# EAGLE board BluetoothBoard-0BAC0702 (EAGLE 5.10)
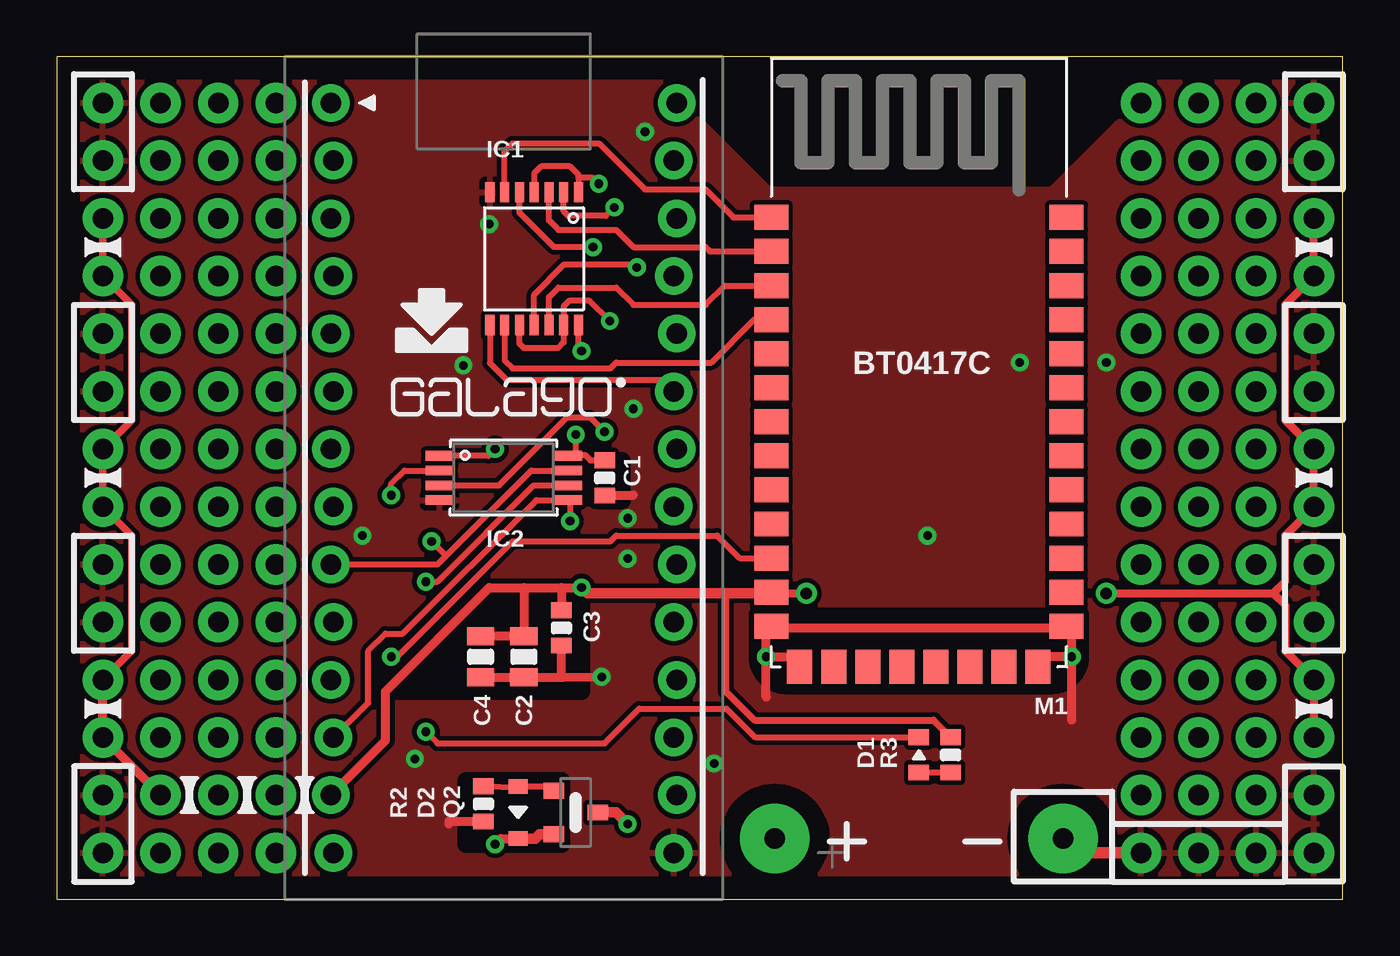
[diagram p0: board, top side]
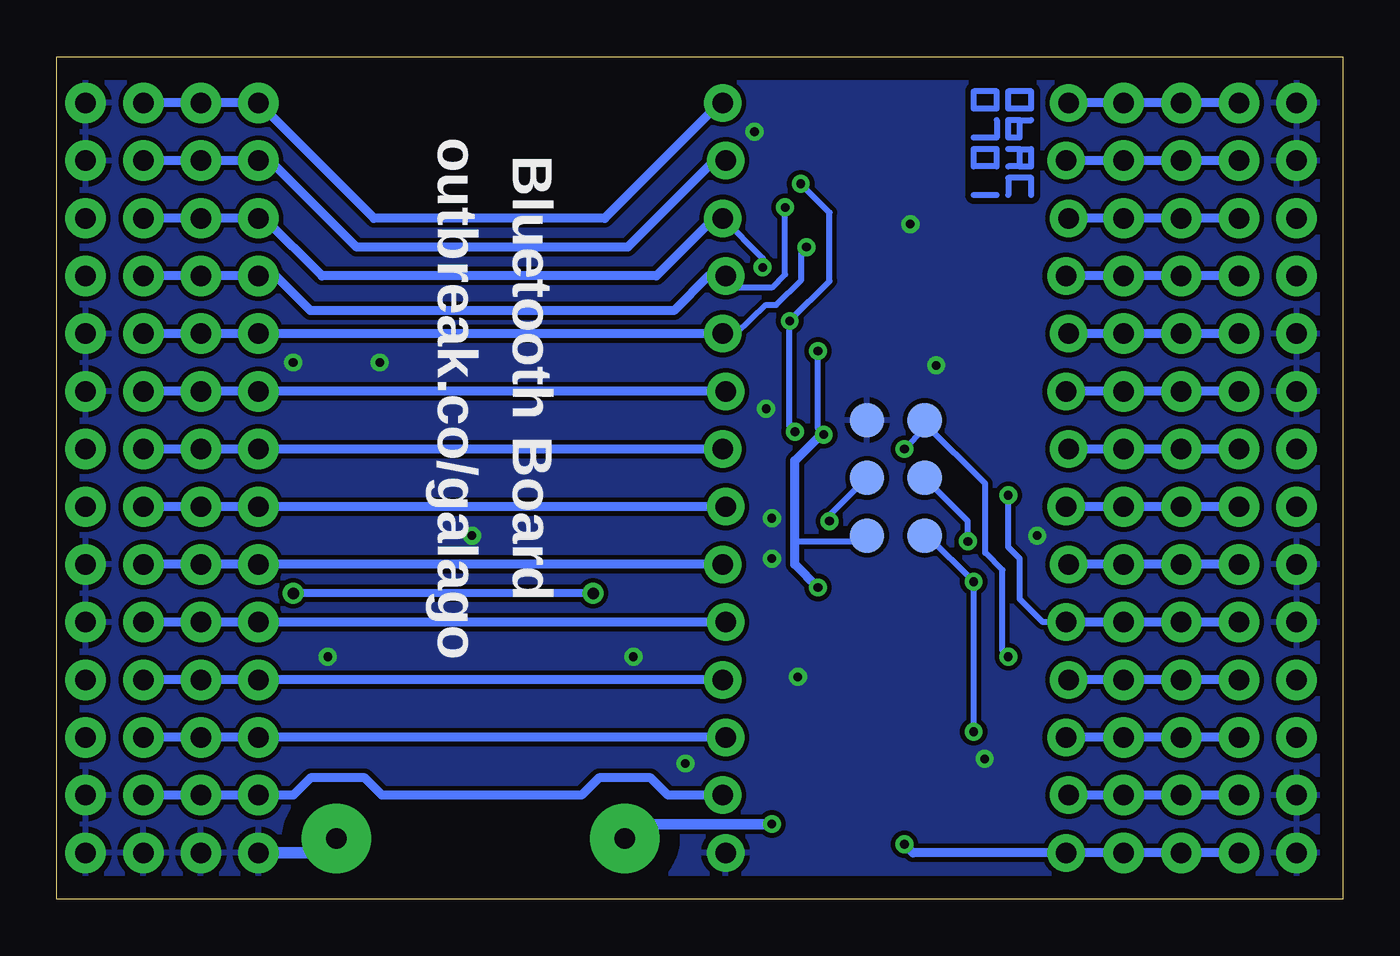
[diagram p1: board, bottom side, seen from below]

Size 56.64 x 37.08 mm. Coordinates in mm from the lower left corner, seen from the top.
Outline: 0,0 56.64,0 56.64,37.08 0,37.08 0,0
Copper layers (1*16): Top 0.035mm / dielectric 1.5mm / Bottom 0.035mm
Design rules "default *": minimum track width 8mil, minimum drill 15mil, track to track 8mil, track to pad 8mil, pad to pad 8mil, via to via 8mil, smd to smd 8mil, copper to edge 40mil, drill to drill 8mil, minimum pad ring 10mil, minimum via ring 8mil, stop-mask expansion 4mil, vias tented up to drill 20mil, thermal gap 10mil
tRestrict: area 42,0.4 to 46.6,5; area 29.3,0.4 to 33.9,5; area 14.7,9.1 to 23.1,13; area 23.9,17.5 to 24.9,19.3; area 18,2.4 to 22.2,5.2; area 30.9,9.4 to 45.1,12.4
bRestrict: area 29.3,0.4 to 33.9,5; area 42,0.4 to 46.6,5; area 13.7,31 to 16.3,35.6

## Footprints (pad centres in the part's own frame; a part is rotated, then mirrored left to right if it is on the bottom)
0603 = smd 0.7 x 0.9: 1 -0.777,0; 2 0.777,0
0805 = smd 0.8 x 1.2: 1 -0.9,0; 2 0.9,0
0603-DIODE = smd 0.7 x 0.9: 1 -0.777,0; 2 0.777,0
SOD-323 = smd 0.63 x 0.83: A -1.15,0; K 1.15,0
TSSOP14 = smd 0.4 x 0.9: 1 2.275,2.925; 2 1.625,2.925; 3 0.975,2.925; 4 0.325,2.925; 5 -0.325,2.925; 6 -0.975,2.925; 7 -1.625,2.925; 8 -1.625,-2.925; 9 -0.975,-2.925; 10 -0.325,-2.925; 11 0.325,-2.925; 12 0.975,-2.925; 13 1.625,-2.925; 14 2.275,-2.925
TSSOP8 = smd 1.25 x 0.42: 1 -2.825,0.975; 2 -2.825,0.325; 3 -2.825,-0.325; 4 -2.825,-0.975; 5 2.825,-0.975; 6 2.825,-0.325; 7 2.825,0.325; 8 2.825,0.975
HEADER-1X14-NO-SILK-CHUNKY = drill 0.9 pad 1.778 round: 1 0,0; 2 2.54,0; 3 5.08,0; 4 7.62,0; 5 10.16,0; 6 12.7,0; 7 15.24,0; 8 17.78,0; 9 20.32,0; 10 22.86,0; 11 25.4,0; 12 27.94,0; 13 30.48,0; 14 33.02,0
AVR-ISP-PINPAD = smd 1.524 x 1.524: GND 2.54,1.27; MISO -2.54,-1.27; MOSI 0,1.27; RESET 2.54,-1.27; SCK 0,-1.27; VTG -2.54,1.27
KEYSTONE-BATTERY-HOLDER-2X-AAA-CHUNKY = drill 0.9 pad 3.048 round: MINUS -6.35,0; PLUS 6.35,0
BLUETOOTH-MODULE-BLUEGIGA-BT0417C = smd 1.5 x 1.1: 1 -6.5,6.39; 2 -6.5,4.89; 3 -6.5,3.39; 4 -6.5,1.89; 5 -6.5,0.39; 6 -6.5,-1.11; 7 -6.5,-2.61; 8 -6.5,-4.11; 9 -6.5,-5.61; 10 -6.5,-7.11; 11 -6.5,-8.61; 12 -6.5,-10.11; 13 -6.5,-11.61; 22 6.5,-11.61; 23 6.5,-10.11; 24 6.5,-8.61; 25 6.5,-7.11; 26 6.5,-5.61; 27 6.5,-4.11; 28 6.5,-2.61; 29 6.5,-1.11; 30 6.5,0.39; 31 6.5,1.89; 32 6.5,3.39; 33 6.5,4.89; 34 6.5,6.39 | smd 1.1 x 1.5: 14 -5.25,-13.4; 15 -3.75,-13.4; 16 -2.25,-13.4; 17 -0.75,-13.4; 18 0.75,-13.4; 19 2.25,-13.4; 20 3.75,-13.4; 21 5.25,-13.4
GALAGO-LOCKING = drill 0.9 pad 1.651 round: 1 -7.62,16.51; 2 -7.493,13.97; 3 -7.62,11.43; 4 -7.493,8.89; 5 -7.62,6.35; 6 -7.493,3.81; 7 -7.62,1.27; 8 -7.493,-1.27; 9 -7.62,-3.81; 10 -7.493,-6.35; 11 -7.62,-8.89; 12 -7.493,-11.43; 13 -7.62,-13.97; 14 -7.493,-16.51; 15 7.493,-16.51; 16 7.62,-13.97; 17 7.493,-11.43; 18 7.62,-8.89; 19 7.493,-6.35; 20 7.62,-3.81; 21 7.493,-1.27; 22 7.62,1.27; 23 7.493,3.81; 24 7.62,6.35; 25 7.493,8.89; 26 7.62,11.43; 27 7.493,13.97; 28 7.62,16.51
SOT23-3 = smd 0.7 x 0.9: 1 0.95,0.97; 2 -0.95,0.97; 3 0,-0.97

## Placement (x,y rotation side)
16OCT2012  Outbreak Galago Bluetooth App Board, version 0BAC0702  [INFO-BLOCK]  6.6,-3.81 0 top  (outside the outline)
C1  100n 0603  [0603]  24.13,18.54 90 top
C2  4.7u 25V 0805  [0805]  20.57,10.67 90 top
C3  100n 0603  [0603]  22.23,11.94 90 top
C4  4.7u 25V 0805  [0805]  18.67,10.67 90 top
D1  GREEN 0603  [0603-DIODE]  37.97,6.35 90 top
D2  5.6V Zener SOD-323  [SOD-323]  20.32,3.81 270 top
IC1  74HC125-TSSOP14  [TSSOP14]  20.7,28.19 0 top
IC2  Atmel ATtiny45 SSOP8  [TSSOP8]  19.68,18.54 0 top
K1$  HEADER-1X14-NO-SILK-CHUNKY  [HEADER-1X14-NO-SILK-CHUNKY]  4.57,2.03 90 top
K2$  HEADER-1X14-NO-SILK-CHUNKY  [HEADER-1X14-NO-SILK-CHUNKY]  7.11,2.03 90 top
K3$  HEADER-1X14-NO-SILK-CHUNKY  [HEADER-1X14-NO-SILK-CHUNKY]  9.65,2.03 90 top
K4$  HEADER-1X14-NO-SILK-CHUNKY  [HEADER-1X14-NO-SILK-CHUNKY]  47.75,35.05 270 top
K5$  HEADER-1X14-NO-SILK-CHUNKY  [HEADER-1X14-NO-SILK-CHUNKY]  50.29,35.05 270 top
K6$  HEADER-1X14-NO-SILK-CHUNKY  [HEADER-1X14-NO-SILK-CHUNKY]  52.83,35.05 270 top
K7$  HEADER-1X14-NO-SILK-CHUNKY  [HEADER-1X14-NO-SILK-CHUNKY]  2.03,2.03 90 top
K8$  AVR-ISP-PINPAD  [AVR-ISP-PINPAD]  19.68,18.54 90 bottom
K9$  KEYSTONE-BATTERY-HOLDER-2X-AAA-CHUNKY  [KEYSTONE-BATTERY-HOLDER-2X-AAA-CHUNKY]  37.97,2.67 180 top
K10$  HEADER-1X14-NO-SILK-CHUNKY  [HEADER-1X14-NO-SILK-CHUNKY]  55.37,2.03 90 top
M1  BLUETOOTH-MODULE-BLUEGIGA-BT0417C  [BLUETOOTH-MODULE-BLUEGIGA-BT0417C]  37.97,23.62 0 top
M2$  GALAGO-040A-LOCKING  [GALAGO-LOCKING]  19.68,18.54 0 top
Q2  Vishay SI2301CDS SOT23-3  [SOT23-3]  22.86,3.81 90 top
R2  10k 1% 0603  [0603]  18.8,4.19 90 top
R3  47 0603  [0603]  39.37,6.35 90 top
U$1  [GALAGO-LOGO]  19.68,22.1 0 top
U$2  [GALAGO-APP-BOARD-SYMBOL]  16.51,24.89 0 top

## Library data of the parts
16OCT2012 C1-C4 D1 D2 IC1 IC2 K1$ K2$ K3$ K4$ K5$ K6$ K7$ K8$ K9$ K10$ M1 Q2 R2 R3 = Outbreak
M2$ U$1 U$2 = Outbreak-v0

## Nets
!BT_RESET: IC2.1 K8$.RESET M1.11
!BT_SEL: IC1.1 IC1.4 IC1.10 IC1.13 IC2.3
!LED_EN: D1.2 IC2.6 K8$.MISO
A0: K4$.13 K5$.13 K6$.13 M2$.16
A1: K4$.12 K5$.12 K6$.12 M2$.17
A2: K4$.11 K5$.11 K6$.11 M2$.18
A3: K4$.10 K5$.10 K6$.10 M2$.19
A5: K4$.9 K5$.9 K6$.9 M2$.20
A7: K4$.8 K5$.8 K6$.8 M2$.21
BATT: K9$.PLUS Q2.3
CTS: IC1.11 K4$.3 K5$.3 K6$.3 M2$.26
GND: C1.1 C2.1 C3.1 C4.1 IC1.7 IC2.4 K4$.14 K5$.14 K6$.14 K7$.1 K7$.2 K7$.5 K7$.6 K7$.9 K7$.10 K7$.13 K7$.14 K8$.GND K9$.MINUS K10$.1 K10$.2 K10$.5 K10$.6 K10$.9 K10$.10 K10$.13 K10$.14 M1.13 M1.14 M1.21 M1.22 M2$.15 R2.1
MISO: K1$.4 K2$.4 K3$.4 M2$.11
MOSI: IC2.5 K1$.3 K2$.3 K3$.3 K8$.MOSI M2$.12
N$1: IC1.12 M1.3
N$2: IC1.9 M1.4
N$3: IC1.6 M1.1
N$4: IC1.3 M1.2
N$6: D2.A Q2.1 R2.2
N$15: D1.1 R3.1
P0: K4$.2 K5$.2 K6$.2 M2$.27
P1: K4$.1 K5$.1 K6$.1 M2$.28
P2: K1$.14 K2$.14 K3$.14 M2$.1
P3: K1$.13 K2$.13 K3$.13 M2$.2
P4: K1$.12 K2$.12 K3$.12 M2$.3
P5: K1$.9 K2$.9 K3$.9 M2$.6
P6: K1$.8 K2$.8 K3$.8 M2$.7
P7: K1$.7 K2$.7 K3$.7 M2$.8
P8: K4$.7 K5$.7 K6$.7 M2$.22
RTS: IC1.8 K4$.6 K5$.6 K6$.6 M2$.23
RXD: IC1.5 K4$.5 K5$.5 K6$.5 M2$.24
SCK: IC2.7 K1$.6 K2$.6 K3$.6 K8$.SCK M2$.9
SCL: K1$.11 K2$.11 K3$.11 M2$.4
SDA: K1$.10 K2$.10 K3$.10 M2$.5
SEL: IC2.2 K1$.5 K2$.5 K3$.5 M2$.10
TXD: IC1.2 K4$.4 K5$.4 K6$.4 M2$.25
VDD: C1.2 C2.2 C3.2 C4.2 IC1.14 IC2.8 K1$.2 K2$.2 K3$.2 K7$.3 K7$.4 K7$.7 K7$.8 K7$.11 K7$.12 K8$.VTG K10$.3 K10$.4 K10$.7 K10$.8 K10$.11 K10$.12 M1.12 M2$.13 R3.2
VIN: D2.K K1$.1 K2$.1 K3$.1 M2$.14 Q2.2

## Tracks (layer width: path | path; a pad name or v marks a point on that pad's centre or on a via)
!BT_RESET  (via drill 0.38)
  Top 0.254: M1.11 30.07,15.01 29.08,16 24.64,16 24.38,15.75 20.07,15.75 14.99,10.67 v14.73,10.67 | IC2.1 19.01,19.52 v19.3,19.81
  Bottom 0.254: v14.73,10.67 14.99,10.92 14.99,14.48 15.75,15.24 15.75,18.29 18.41,20.95 | 18.41,20.95 K8$.RESET | v19.3,19.81 18.41,20.7 18.41,20.95
!BT_SEL  (via drill 0.38)
  Top 0.254: IC1.4 21.03,31.95 21.34,32.26 22.61,32.26 22.98,31.89 22.98,31.75 | 22.98,31.75 IC1.1 | IC1.10 20.38,24.45 20.57,24.26 22.07,24.26 22.33,24.51 IC1.13 22.33,26.11 22.55,26.34 23.47,26.34 v24.36,25.45 | IC2.3 19.49,18.22 22.48,21.21 23.5,21.21 v24.13,20.57 | v23.88,31.5 23.62,31.75 22.98,31.75
  Bottom 0.254: v24.13,20.57 24.36,20.8 v24.36,25.45 22.61,27.2 22.61,30.23 v23.88,31.5
!LED_EN  (via drill 0.38)
  Top 0.254: v16.26,13.97 16.76,13.97 21.01,18.22 IC2.6 | D1.2 30.75,7.13 29.49,8.38 25.65,8.38 24.13,6.86 16.76,6.86 v16.26,7.37
  Bottom 0.254: K8$.MISO 18.29,16 v16.26,13.97 v16.26,7.37
A0
  Bottom 0.406: M2$.16 29.72,4.57 30.48,5.33 32.77,5.33 33.53,4.57 42.32,4.57 43.08,5.33 45.47,5.33 46.23,4.57 K4$.13 K5$.13 K6$.13
A1
  Bottom 0.406: K6$.12 K5$.12 K4$.12 M2$.17
A2
  Bottom 0.406: M2$.18 K4$.11 K5$.11 K6$.11
A3
  Bottom 0.406: K6$.10 K5$.10 K4$.10 M2$.19
A5
  Bottom 0.406: M2$.20 K4$.9 K5$.9 K6$.9
A7
  Bottom 0.406: M2$.21 K4$.8 K5$.8 K6$.8
BATT  (via drill 0.38)
  Top 0.457: v25.15,3.3 24.64,3.81 Q2.3
  Bottom 0.457: K9$.PLUS 30.99,3.3 v25.15,3.3
CTS  (via drill 0.38)
  Top 0.254: IC1.11 21.03,26.61 22.35,27.94 25.43,27.94 v25.55,27.81
  Bottom 0.254: v25.55,27.81 25.55,28.22 M2$.26
  Bottom 0.406: K6$.3 K5$.3 K4$.3 47.5,29.97 44.96,27.43 30.23,27.43 27.69,29.97 M2$.26
GND  (via drill 0.38)
  Top 0.356: 31.75,11.94 31.47,11.94 M1.13
  Top 0.406: C4.1 C2.1 22.23,9.77 22.35,9.77 | 22.35,9.77 v24,9.78 | C3.1 22.23,9.77 22.35,9.77 | C1.1 25.4,17.78 | R2.1 17.27,3.41 17.27,3.3 | M1.13 31.24,12.01 v31.24,10.67 | v31.24,10.67 32.72,10.67 M1.14 | M1.22 44.7,12.01 v44.7,10.67 | v44.7,10.67 43.22,10.67 M1.21 | 31.75,11.94 44.2,11.94 | 44.7,7.87 v44.7,10.67 | 31.24,8.89 v31.24,10.67
  Top 0.508: K4$.14 44.96,2.03 K9$.MINUS
  Bottom 0.508: K9$.MINUS 44.96,2.03 K4$.14
  other vias: 15.77,6.17 13.46,16 25.15,14.99 25.15,16.76 19.05,29.72 38.35,16 28.96,5.97 42.42,23.62 25.4,21.59 17.91,23.5 25.91,33.78 46.23,23.62
  pour Top: 56.64,37.08 56.64,0 0,0 0,37.08 25.53,37.08 31.37,31.24 43.81,31.24 49.66,37.08
  pour Bottom: 56.64,37.08 56.64,0 0,0 0,37.08 25.53,37.08 31.37,31.24 43.81,31.24 49.66,37.08
MISO
  Bottom 0.406: M2$.11 K3$.4 K2$.4 K1$.4
MOSI  (via drill 0.38)
  Top 0.254: M2$.12 13.72,8.64 13.72,10.92 14.48,11.68 15.24,11.68 21.12,17.57 IC2.5 22.61,17.57 v22.61,16.64
  Bottom 0.254: K8$.MOSI 22.61,16.89 v22.61,16.64
  Bottom 0.406: K1$.3 K2$.3 K3$.3 M2$.12
N$1
  Top 0.254: M1.3 29.43,27.01 28.57,26.16 25.4,26.16 24.64,26.92 22.1,26.92 21.68,26.5 IC1.12
N$2
  Top 0.254: M1.4 30.72,25.51 28.83,23.62 24.64,23.62 24.38,23.37 20.07,23.37 19.73,23.71 IC1.9
N$3
  Top 0.254: M1.1 29.8,30.01 28.57,31.24 25.91,31.24 23.88,33.27 20.07,33.27 19.73,32.93 IC1.6
N$4
  Top 0.254: M1.2 28.77,28.51 28.57,28.7 25.4,28.7 24.64,29.46 22.1,29.46 21.68,29.89 IC1.3
N$6
  Top 0.254: R2.2 20.32,4.93 D2.A 21.89,4.96 Q2.1
N$7
  Bottom 0.254: 13.72,35.56 14.73,35.56 14.73,34.8 13.72,34.8 13.72,35.56
N$8
  Bottom 0.254: 14.22,34.29 13.72,34.29 | 14.22,34.29 14.73,34.29 14.73,33.53 14.22,33.53 14.22,34.29
N$9
  Bottom 0.254: 14.22,33.02 13.72,33.02 13.72,32.26 14.22,32.26 | 14.22,33.02 14.73,33.02 | 14.22,32.26 14.73,32.26 | 14.22,32.26 14.22,33.02
N$10
  Bottom 0.254: 14.73,30.99 14.73,31.75 13.72,31.75 13.72,30.99
N$11
  Bottom 0.254: 15.24,35.56 16.26,35.56 16.26,34.8 15.24,34.8 15.24,35.56
N$12
  Bottom 0.254: 16.26,33.53 15.24,33.53 15.24,34.29
N$13
  Bottom 0.254: 15.24,33.02 16.26,33.02 16.26,32.26 15.24,32.26 15.24,33.02
N$14
  Bottom 0.254: 15.24,30.99 16.26,30.99
N$15
  Top 0.254: D1.1 R3.1
P0
  Bottom 0.406: M2$.27 27.69,32.51 31.5,28.7 43.43,28.7 47.24,32.51 K4$.2 K5$.2 K6$.2
P1
  Bottom 0.406: K6$.1 K5$.1 K4$.1 42.67,29.97 32.51,29.97 27.43,35.05 M2$.28
P2
  Bottom 0.406: M2$.1 K3$.14 K2$.14 K1$.14
P3
  Bottom 0.406: K1$.13 K2$.13 K3$.13 M2$.2
P4
  Bottom 0.406: M2$.3 K3$.12 K2$.12 K1$.12
P5
  Bottom 0.406: K1$.9 K2$.9 K3$.9 M2$.6
P6
  Bottom 0.406: M2$.7 K3$.8 K2$.8 K1$.8
P7
  Bottom 0.406: K1$.7 K2$.7 K3$.7 M2$.8
P8
  Bottom 0.406: K6$.7 K5$.7 K4$.7 M2$.22
RTS
  Top 0.254: M2$.23 26.67,22.86 19.81,22.86 19.08,23.6 IC1.8
  Bottom 0.406: M2$.23 K4$.6 K5$.6 K6$.6
RXD  (via drill 0.38)
  Top 0.254: IC1.5 20.38,30.23 21.9,28.7 v23.62,28.7
  Bottom 0.254: M2$.24 26.72,24.89 25.4,26.16 24.94,26.16 23.85,27.25 23.85,28.47 v23.62,28.7
  Bottom 0.406: K6$.5 K5$.5 K4$.5 M2$.24
SCK  (via drill 0.38)
  Top 0.254: IC2.7 20.9,18.87 17.14,15.11 | 17.14,15.11 16.76,14.73 M2$.9 | 17.14,15.11 v16.51,15.75
  Bottom 0.254: K8$.SCK 16.51,16.64 v16.51,15.75
  Bottom 0.406: M2$.9 K3$.6 K2$.6 K1$.6
SCL
  Bottom 0.406: K1$.11 K2$.11 K3$.11 M2$.4
SDA
  Bottom 0.406: M2$.5 K3$.10 K2$.10 K1$.10
SEL  (via drill 0.38)
  Top 0.254: v14.73,17.78 14.73,18.29 15.31,18.87 IC2.2
  Bottom 0.254: M2$.10 13.21,12.19 14.22,13.21 14.22,14.99 14.73,15.49 v14.73,17.78
  Bottom 0.406: K1$.5 K2$.5 K3$.5 M2$.10
TXD  (via drill 0.38)
  Top 0.254: IC1.2 22.33,30.28 22.53,30.07 24.18,30.07 v24.56,30.45
  Bottom 0.254: v24.56,30.45 24.56,27.51 25.15,26.92 26.67,26.92 M2$.25
  Bottom 0.406: M2$.25 27.94,27.43 29.46,25.91 45.47,25.91 46.99,27.43 K4$.4 K5$.4 K6$.4
VDD  (via drill 0.38, 0.51)
  Top 0.254: IC1.14 22.98,24.27 v23.11,24.13 | 22.86,19.56 22.86,19.52 IC2.8 | v22.86,20.45 22.86,19.56 | C1.2 23.5,19.32 23.27,19.56 22.86,19.56
  Top 0.305: 29.46,13.46 29.46,9.14 30.73,7.87 38.62,7.87 R3.2
  Top 0.33: K7$.4 3.3,10.92 3.3,16 K7$.7 K7$.8 3.3,21.08 3.3,26.16 K7$.11 K7$.12
  Top 0.356: v33.02,13.46 31.5,13.46 31.47,13.48 M1.12 | v46.23,13.46 53.59,13.46 | 53.59,13.46 54.1,12.95 54.1,10.92 K10$.4 K10$.3 | 53.59,13.46 54.1,13.97 54.1,16 K10$.7 K10$.8 54.1,21.08 54.1,26.16 K10$.11 K10$.12
  Top 0.406: M2$.13 14.48,6.99 14.48,9.14 19.05,13.72 20.57,13.72 | 20.57,13.72 22.23,13.72 | 22.23,13.72 v23.11,13.72 | K1$.2 K7$.3 K7$.4 | 20.57,13.72 C2.2 C4.2 | 22.23,13.72 C3.2
  Top 0.457: v23.11,13.72 23.37,13.46 29.46,13.46 31.47,13.46 M1.12
  Bottom 0.254: v23.11,24.13 23.11,20.7 v22.86,20.45 | 24.13,15.75 21.21,15.75 K8$.VTG
  Bottom 0.356: v33.02,13.46 v46.23,13.46
  Bottom 0.406: M2$.13 K3$.2 K2$.2 K1$.2 | v23.11,13.72 24.13,14.73 24.13,15.75 24.13,19.3 22.99,20.45 v22.86,20.45
VIN  (via drill 0.38)
  Top 0.406: v19.3,2.41 19.55,2.66 D2.K
  Top 0.457: Q2.2 21.27,2.86 21.07,2.66 D2.K
  Bottom 0.406: K1$.1 K2$.1 K3$.1 M2$.14 18.92,2.03 v19.3,2.41

## Text on the board
tPlace: BT0417C
bPlace: outbreak.co/galago | Bluetooth Board
tTest: Galago Bluetooth(R) Board | 0BAC-0702 (Top Side)